# Altium PCB 夏友.PcbDoc (part 1 of 6)
Units mm, origin at the board's own origin, x right, y up, seen from the top; angles counter-clockwise.
Board outline 130.55 x 65.02 mm, 2 copper layers (Top Layer, Bottom Layer); 162 components, 175 nets, 628 pads, 694 vias.
Unrouted connection lines stored in the file: 1.
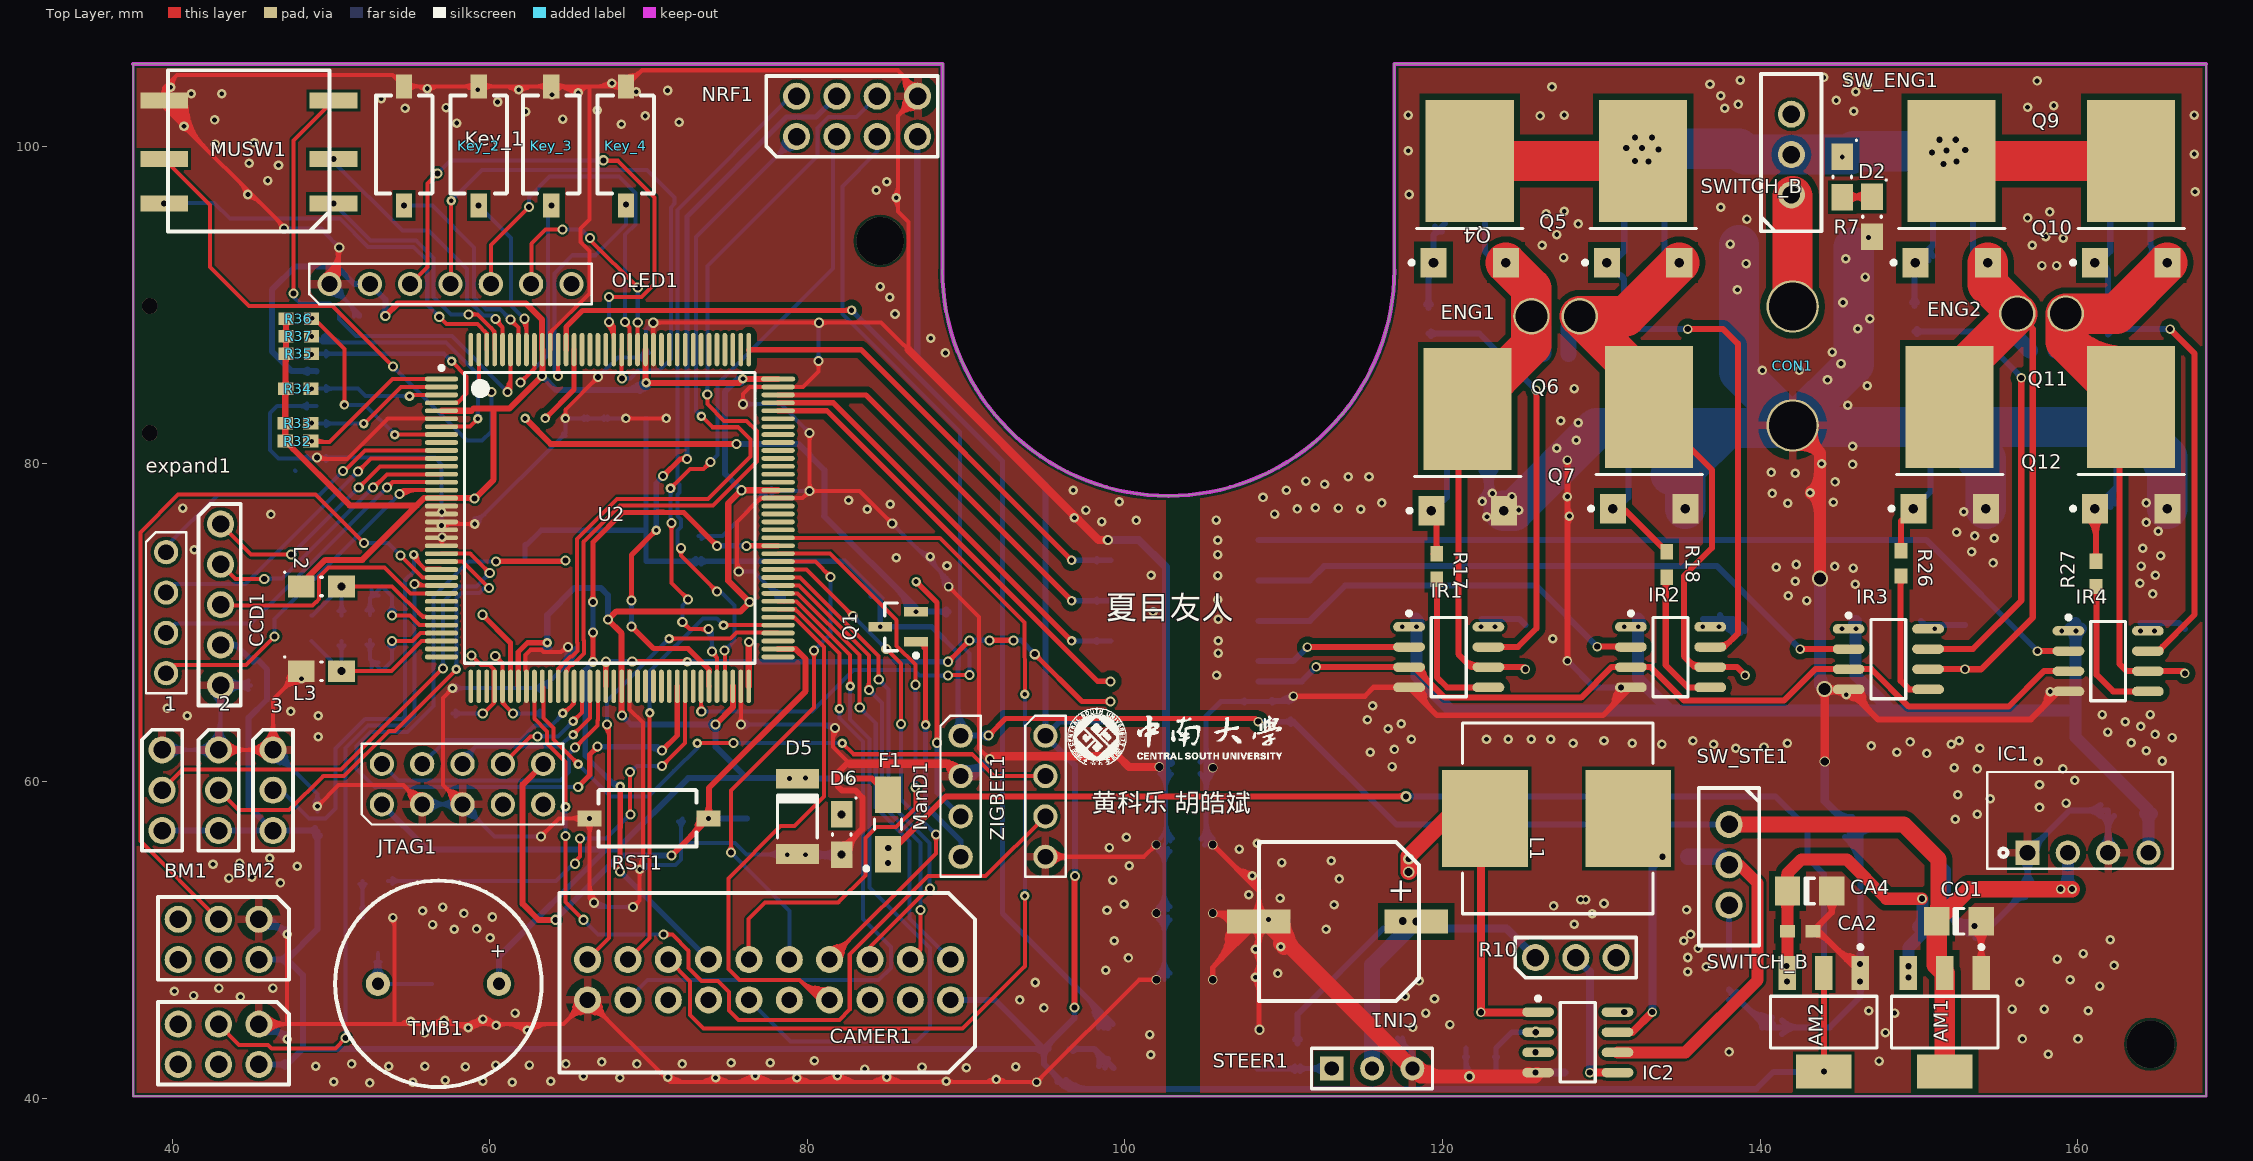
[diagram p0: Top Layer view]
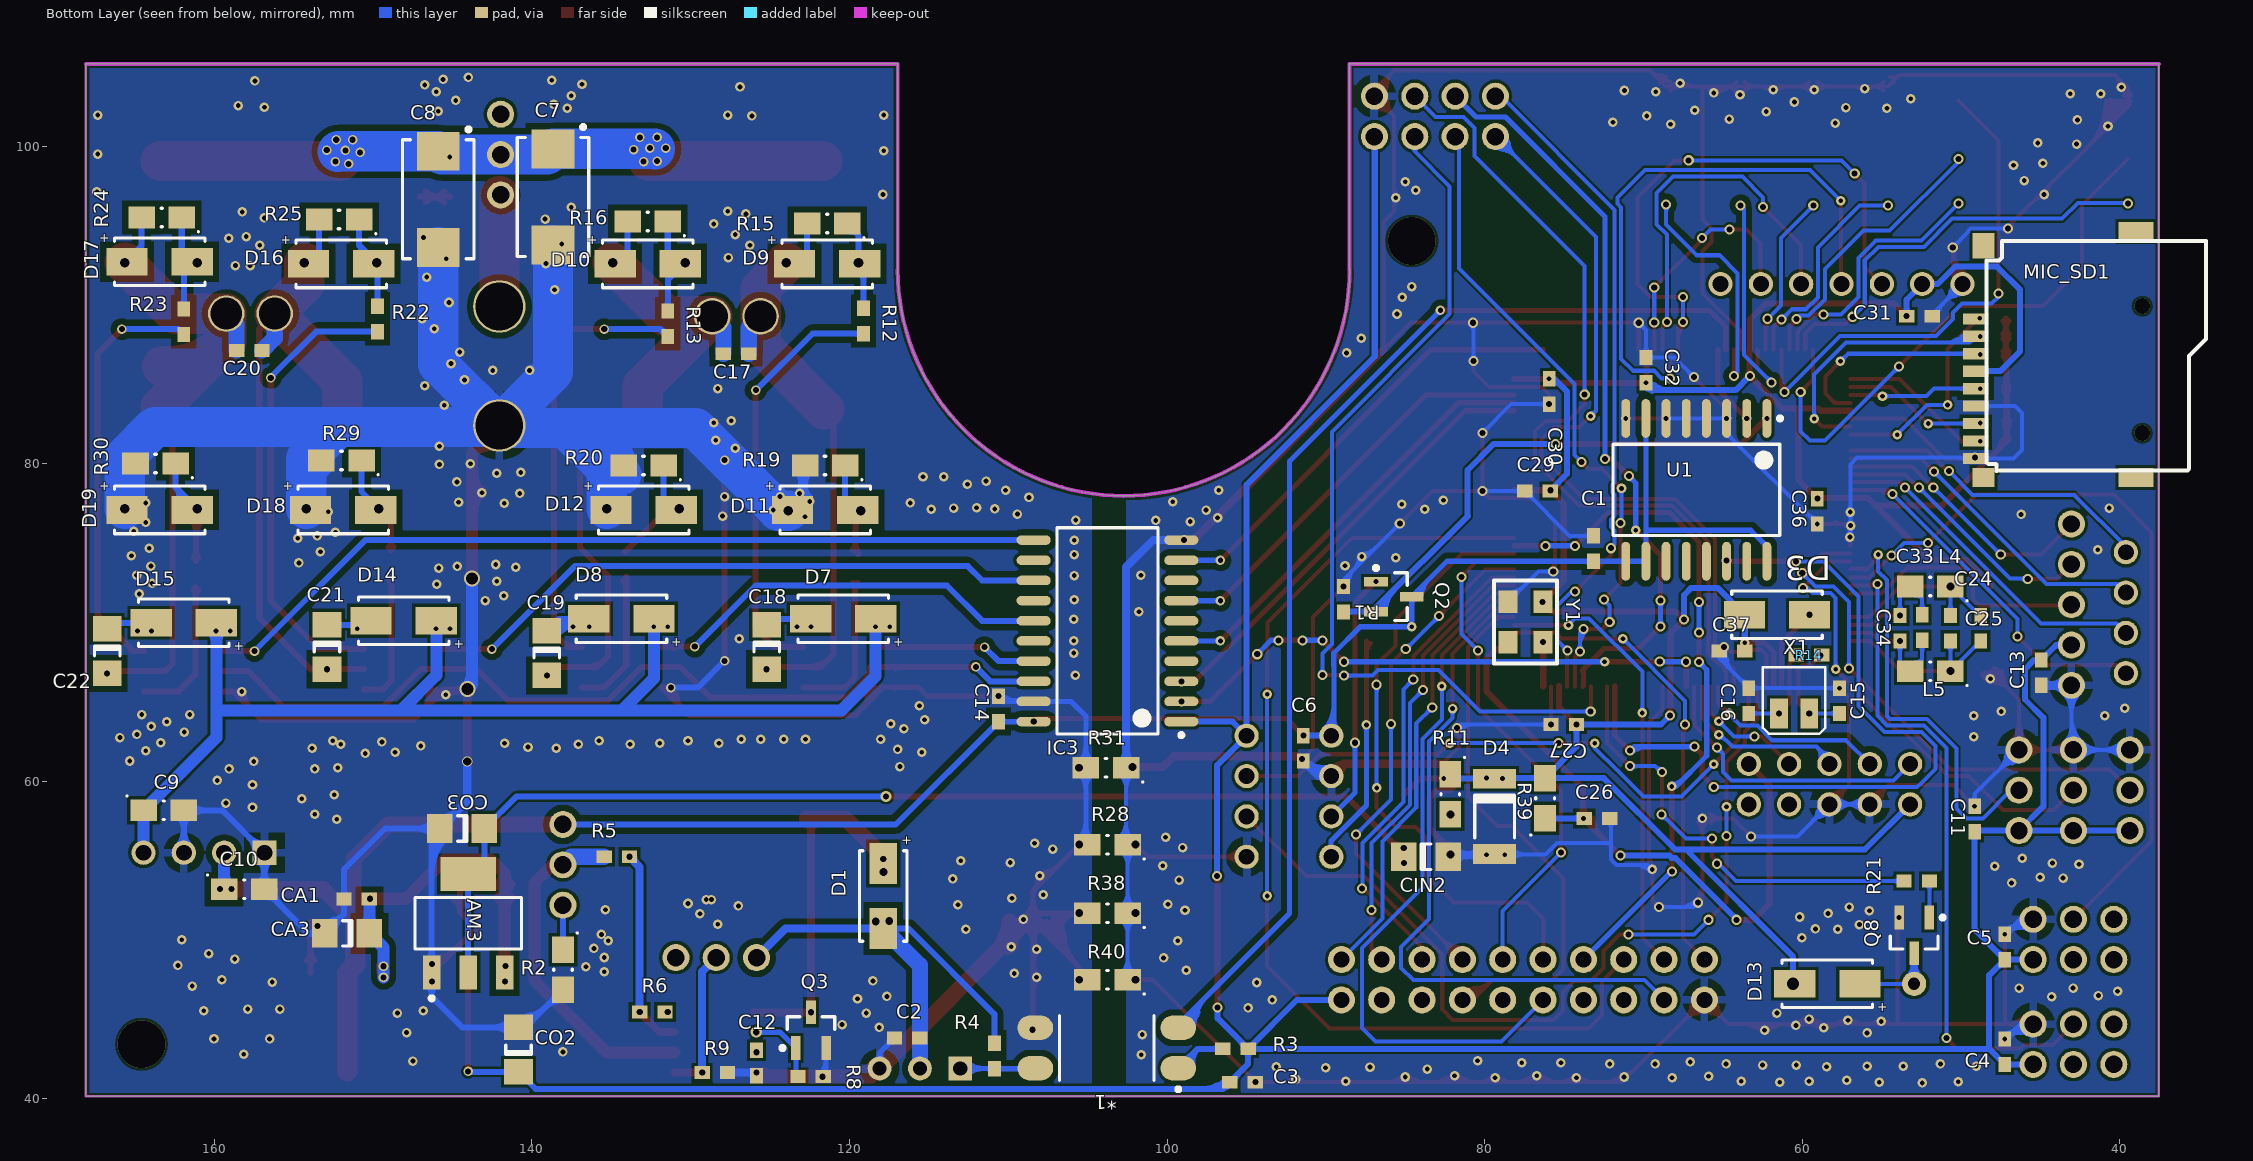
[diagram p1: Bottom Layer view, seen from below]

## Layer stack, top to bottom
Top Layer: signal copper 0.0356
Dielectric: dielectric 0.32, FR-4, Dk 4.8
Bottom Layer: signal copper 0.0356

## Board outline
37.542,40.162 37.542,105.177 88.519,105.177 88.519,92.202 88.509,92.202 ccw(c102.738,92.202) 116.967,92.202 116.967,105.177 168.094,105.177 168.094,40.162

## Design rules (kind name [scope] priority, off if disabled: settings)
Clearance Clearance_5 [InNetClass('Big_current') vs inpoly] p1: gap=0.381
Clearance Clearance_4 [InNetClass('SIN_pwm') vs inpoly] p2: gap=0.381
Clearance Clearance_3 [InNetClass('SIN_clk') vs inpoly] p3: gap=0.381
Clearance Clearance_2 [ispad vs inpoly] p4: gap=0.203
Clearance Clearance_1 [isvia vs inpoly] p5: gap=0.152
Clearance [All] p6: gap=0.152
PolygonConnect PolygonConnect_3 [InPadClass('Big_current') vs ispoly] p1: connectstyle=Direct reliefconductorwidth=0.254 reliefentries=4 polygonreliefangle="90 Angle" airgapwidth=0.254
PolygonConnect PolygonConnect_2 [IsThruPin vs ispoly] p2: connectstyle=Relief reliefconductorwidth=0.508 reliefentries=4 polygonreliefangle="90 Angle" airgapwidth=0.508
PolygonConnect PolygonConnect_1 [IsSMTPin or IsVia vs ispoly] p3: connectstyle=Direct reliefconductorwidth=0.254 reliefentries=4 polygonreliefangle="90 Angle" airgapwidth=0.254
PolygonConnect [All] p4: connectstyle=Relief reliefconductorwidth=0.508 reliefentries=4 polygonreliefangle="90 Angle" airgapwidth=0.508
RoutingVias [All] p1: holewidth=0.3 width=0.6 viastyle="Through Hole" minholewidth=0.3 minwidth=0.6 maxholewidth=100 maxwidth=100
SolderMaskExpansion [All] p1: expansion=0.102
Width [All] p1: maxlimit=25.4 minlimit=0.254 preferedwidth=0.254
Width SIN_pwm_ad [InNetClass('SIN_pwm') or InNetClass('SIN_ad')] p2: maxlimit=0.381 minlimit=0.33 preferedwidth=0.33
28 further rules are at their usual default settings.

## Classes and differential pairs
net class SIN_pwm: NetC17_1 NetC17_2 NetC20_1 NetC20_2 NetD9_2 NetD10_2 NetD11_2 NetD12_2 NetD16_2 NetD17_2 NetD18_2 NetD19_2 NetIR1_5 NetIR1_7 NetIR2_5 NetIR2_7 NetIR3_5 NetIR3_7 NetIR4_5 NetIR4_7 PTC1 PTC2 PTC3 PTC4 PTD4 PTD5 PTD6 PTD7 PWM1 PWM2 PWM3 PWM4 PWM_STEER
net class SIN_ad: AD0 AD1 AD2 AD3 AD4 AD5
net class Big_current: BATTERY NetC17_1 NetC17_2 NetC20_1 NetC20_2 NetCON1_2 VCC-5.5V VCC-5V
net class SIN_clk: CLK TCLK
net class V_other: +3.3V MPU_3V3 NetIC2_6 OSC VBAT VCC-3.3V VCC-15V VDDA VRH

## Components (designator, comment, footprint, x,y, rotation, side; value= is the part's Value field where it differs from the comment)
1 "CON3" HDR1*3 39.37,61.976 r0 top
2 "CON3" HDR1*3 42.926,61.976 r0 top
3 "CON3" HDR1*3 46.355,61.976 r0 top
*1 "IC 2*2" PC817 103.8,43.2 r0 bottom
AM1 "AMS1117" SOT223 151.638,44.831 r180 top
AM2 "AMS1117" SOT223 144.018,44.831 r180 top
AM3 "AMS1117" SOT223 144.018,51.054 r180 bottom
BM1 "±ŕÂëĆ÷×ó" HDR2*3 45.466,51.308 r270 top
BM2 "±ŕÂëĆ÷×ó" HDR2*3 45.466,44.704 r270 top
C1 "Cap Semi" 0603 73.15,73.85 r90 bottom
C2 "Cap" 0603 117.175,43.825 r180 bottom
C3 "Cap" 0603 94.45,41.05 r0 bottom
C4 "Cap Semi" 0603 47.244,42.164 r90 bottom
C5 "Cap Semi" 0603 47.244,48.768 r90 bottom
C6 "Cap Semi" 0603 91.425,62.875 r270 bottom
C7 "220uF" CAPMP7344X43N 138.675,96.8 r270 bottom
C8 "220uF" CAPMP7344X43N 145.9,96.65 r270 bottom
C9 "105" 0805 163.195,58.166 r180 bottom
C10 "475" 0805 158.125,53.2 r180 bottom
C11 "Cap Semi" 0603 49.149,58.42 r270 bottom
C12 "Cap Semi" 0603 125.857,43.053 r270 bottom
C13 "Cap Semi" 0603 44.958,66.04 r90 bottom
C14 "Cap Semi" 0603 110.617,63.754 r90 bottom
C15 "Cap Semi" 0603 57.658,64.262 r90 bottom
C16 "Cap Semi" 0603 63.373,64.262 r90 bottom
C17 "Cap Semi" 0603 127.95,86.925 r180 bottom
C18 "1uF" C1206 125.222,68.453 r270 bottom
C19 "1uF" C1206 139.065,68.072 r270 bottom
C20 "Cap Semi" 0603 158.6,87.125 r180 bottom
C21 "1uF" C1206 152.908,68.453 r270 bottom
C22 "1uF" C1206 166.751,68.199 r270 bottom
C24 "Cap Semi" 0603 48.768,68.834 r90 bottom
C25 "Cap Semi" 0603 50.673,68.834 r90 bottom
C26 "Cap Semi" 0603 72.136,57.658 r0 bottom
C27 "Cap Semi" 0603 75.825,63.575 r180 bottom
C29 "Cap Semi" 0603 77.475,78.275 r180 bottom
C30 "Cap Semi" 0603 75.946,85.344 r270 bottom
C31 "Cap Semi" 0603 53.425,89.275 r180 bottom
C32 "Cap Semi" 0603 69.85,85.09 r90 bottom
C33 "Cap Semi" 0603 52.451,70.485 r270 bottom
C34 "Cap Semi" 0603 53.848,68.834 r90 bottom
C36 "Cap Semi" 0603 59.055,76.2 r90 bottom
C37 "Cap Semi" 0603 63.627,68.199 r0 bottom
CA1 "Cap Semi" 0603 150.241,52.578 r0 bottom
CA2 "Cap Semi" 0603 141.732,50.546 r0 top
CA3 "10uF" C1206 151.638,50.419 r0 bottom
CA4 "10uF" C1206 143.129,53.086 r0 top
CAMER1 "CAMER" HDR2*10-10*25 89.027,48.768 r270 top
CCD1 "CON5" HDR1*5 43.053,76.2 r0 top
CIN1 "470uF" 470uf-column 113.45,51.175 r270 top
CIN2 "10uF" C1206 83.693,55.245 r180 bottom
CO1 "22uF" C1206 152.527,51.181 r0 top
CO2 "22uF" C1206 140.85,43.1 r90 bottom
CO3 "22uF" C1206 144.399,57.023 r0 bottom
CON1 "PowerIn" Battery 142.05,82.025 r90 top
D1 "1N5819" SS14 117.875,52.775 r270 bottom
D2 "LED0" 0805 145.175,98.05 r270 top
D3 "IN5819" SS14 61.595,70.485 r180 bottom
D4 "Z M4728" LL41 79.375,57.785 r90 bottom
D5 "ZM4728" LL41 79.375,57.785 r90 top
D6 "LED" 0805 82.169,56.642 r270 top
D7 "1N5819" SS14 120.396,70.231 r0 bottom
D8 "1N5819" SS14 134.366,70.231 r0 bottom
D9 "1N5819" SS14 121.412,92.583 r180 bottom
D10 "1N5819" SS14 132.715,92.583 r180 bottom
D11 "1N5819" SS14 121.539,77.089 r180 bottom
D12 "1N5819" SS14 132.969,77.089 r180 bottom
D13 "IN5819" SS14 58.42,47.244 r0 bottom
D14 "1N5819" SS14 148.082,70.104 r0 bottom
D15 "1N5819" SS14 161.925,69.977 r0 bottom
D16 "1N5819" SS14 152.019,92.583 r180 bottom
D17 "1N5819" SS14 163.449,92.71 r180 bottom
D18 "1N5819" SS14 151.892,77.089 r180 bottom
D19 "1N5819" SS14 163.449,77.089 r180 bottom
ENG1 "PowerIn" Dynamo 128.651,89.281 r180 top
ENG2 "PowerIn" Dynamo 159.25,89.45 r180 top
expand1 "CON4" HDR1*4 39.624,74.422 r0 top
F1 "500mA" 1206 85.09,57.277 r90 top
IC1 "B0515S" B0512S 156.845,55.499 r0 top
IC2 "MC34063" SO-8 128.524,43.561 r0 top
IC3 "74hc245" 74HC245D 103.759,69.469 r0 bottom
IR1 "IR2104S" SO-8 120.396,67.818 r0 top
IR2 "IR2104S" SO-8 134.366,67.818 r0 top
IR3 "IR2104S" SO-8 148.082,67.691 r0 top
IR4 "IR2104S" SO-8 161.925,67.564 r0 top
JTAG1 "HEADER 5X2" HDR2*5 53.213,58.547 r90 top
Key_1 "°´ĹĄżŞąŘ" KEY-2 54.61,100.076 r180 top
Key_2 "°´ĹĄżŞąŘ" KEY-2 59.309,100.076 r180 top
Key_3 "°´ĹĄżŞąŘ" KEY-2 63.881,100.076 r180 top
Key_4 "°´ĹĄżŞąŘ" KEY-2 68.58,100.076 r180 top
L1 "Inductor" "INDUCTOR 12*12*7" 127.254,57.658 r0 top
L2 "Inductor" 0805 49.403,72.263 r0 top
L3 "Inductor" 0805 49.403,66.929 r0 top
L4 "Inductor" 0805 51.943,72.263 r0 bottom
L5 "Inductor" 0805 51.943,66.929 r0 bottom
ManD1 "HDR1*4" HDR1*4 89.662,62.865 r0 top
MIC_SD1 "ON9" TF-2 44.039,86.871 r180 bottom locked
MUSW1 "MF_SW" MUL_SW 49.911,94.615 r180 top
NRF1 "HEADER 4X2" HDR2*4 79.325,100.6 r90 top
OLED1 "HDR1*7" HDR1*7 49.911,91.313 r90 top
Q1 "NPN" SOT95P280X125-3N 85.725,69.723 r180 top
Q2 "NPN" SOT95P280X125-3N 85.725,71.628 r180 bottom
Q3 "NPN" SOT95P280X125-3N 122.428,44.323 r90 bottom
Q4 "MOSFET-N" LR7843 121.793,97.536 r270 top
Q5 "MOSFET-N" LR7843 132.715,97.536 r270 top
Q6 "MOSFET-N" LR7843 121.666,81.915 r270 top
Q7 "MOSFET-N" LR7843 133.096,82.042 r270 top
Q8 "NPN" SOT95P280X125-3N 52.959,50.292 r270 bottom
Q9 "MOSFET-N" LR7843 152.146,97.536 r270 top
Q10 "MOSFET-N" LR7843 163.449,97.536 r270 top
Q11 "MOSFET-N" LR7843 152.019,82.042 r270 top
Q12 "MOSFET-N" LR7843 163.449,82.042 r270 top
R1 "Res2" 0603 88.9,72.263 r270 bottom
R2 "332" 0805 138.049,48.133 r270 bottom
R3 "Res2" 0603 96.5,43.15 r180 bottom
R4 "Res2" 0603 110.875,41.9 r90 bottom
R5 "Res2" 0603 133.858,55.245 r0 bottom
R6 "Res2" 0603 133.223,45.466 r180 bottom
R7 "10k" 0805 147.05,95.55 r270 top
R8 "Res2" 0603 121.65,41.4 r0 bottom
R9 "Res2" 0603 129.286,41.656 r180 bottom
R10 "50k" HDR1*3 125.857,48.895 r90 top
R11 "1k" 0805 82.169,59.182 r270 bottom
R12 "Res1" 0603 119.126,89.789 r270 bottom
R13 "Res1" 0603 131.445,88.011 r90 bottom
R14 "1M" 0603 58.775,67.95 r0 bottom
R15 "Res1" 0805 121.412,95.123 r0 bottom
R16 "Res1" 0805 132.715,95.25 r0 bottom
R17 "Res1" 0603 119.65,74.325 r270 top
R18 "Res1" 0603 134.125,72.85 r90 top
R19 "Res1" 0805 121.539,79.883 r0 bottom
R20 "Res1" 0805 132.969,79.883 r0 bottom
R21 "10k" 0603 53.594,53.721 r180 bottom
R22 "Res1" 0603 149.733,89.916 r270 bottom
R23 "Res1" 0603 161.925,88.138 r90 bottom
R24 "Res1" 0805 163.322,95.504 r0 bottom
R25 "Res1" 0805 152.146,95.377 r0 bottom
R26 "Res1" 0603 148.875,74.525 r270 top
R27 "Res1" 0603 161.163,72.263 r90 top
R28 "Res3" 0805 103.759,56.007 r0 bottom
R29 "Res1" 0805 152,80.2 r0 bottom
R30 "Res1" 0805 163.703,80.01 r0 bottom
R31 "Res3" 0805 103.85,60.85 r0 bottom
R32 "47k" 0603 47.125,81.425 r0 top
R33 "47k" 0603 47.125,82.55 r0 top
R34 "47k" 0603 47.15,84.725 r0 top
R35 "47k" 0603 47.175,86.925 r0 top
R36 "47k" 0603 47.175,89.125 r0 top
R37 "47k" 0603 47.175,88.025 r0 top
R38 "Res3" 0805 103.759,51.689 r0 bottom
R39 "103" 0805 76.2,58.928 r90 bottom
R40 "Res3" 0805 103.759,47.498 r0 bottom
RST1 "°´ĹĄżŞąŘ" KEY-2 69.977,57.658 r270 top
STEER1 "Header_Server" HDR1X3 113.03,41.91 r0 top
SW_ENG1 "SWITCH_B" ss12 141.975,96.925 r90 top
SW_STE1 "SWITCH_B" ss12 138.049,57.277 r270 top
TMB1 "Bell" DIP_buzzer 56.769,47.244 r270 top
U1 "74LS160" SOIC-16 66.675,78.35 r270 bottom
U2 "MK60DN512ZVLQ10" MK60DN512ZVLQ10 67.564,76.581 r0 top
X1 "32.768kHz" "XT 32768" 59.055,63.373 r0 bottom
Y1 "50MHZ\3.3v" ÓĐÔ´ľ§Őń5*3.2 77.47,69.977 r270 bottom
ZIGBEE1 "CON4" HDR1*4 94.996,62.865 r0 top

## Footprints (in the part's own frame and the unit in brackets; to place one, negate y for a bottom-side part, rotate by r counter-clockwise, add the part's x,y. Pads: shape width x height; smd on the part's side, far side on the other; paste and mask are expansions set on the pad)
74HC245D [mm] "SOP, 20-Leads, Body 12.80x7.50mm, Pitch 1.27mm, Thermal Pad 4.20.2x3.00.2mm, IPC Medium Density"
  oval 2.15x0.6 smd: 1(-4.65,5.715) 2(-4.65,4.445) 3(-4.65,3.175) 4(-4.65,1.905) 5(-4.65,0.635) 6(-4.65,-0.635) 7(-4.65,-1.905) 8(-4.65,-3.175) 9(-4.65,-4.445) 10(-4.65,-5.715) 11(4.65,-5.715) 12(4.65,-4.445) 13(4.65,-3.175) 14(4.65,-1.905) 15(4.65,-0.635) 16(4.65,0.635) 17(4.65,1.905) 18(4.65,3.175) 19(4.65,4.445) 20(4.65,5.715)
  silkscreen extent -4.77,-6.5 3.17,6.69, body extent -3.8,-6.5 3.8,6.5, height 2.65
470uf-column [mil] "C?"
  rect 60x157.48 smd: 1(0,193) 2(0,-197)
  silkscreen extent -197,-197 197,200
0603 [mm] "Chip Inductor, 2-Leads, Body 2.54x0.80mm, IPC Medium Density"
  rect 0.965x0.8 smd: 1(0,0) 2(1.6,0)
  body extent -0.23,-0.4 2.31,0.4, height 0.8
0805 [mm] "Chip Inductor, 2-Leads, Body 3.20x1.25mm, IPC Medium Density"
  rect 1.67x1.37 smd: 1(-1.265,0) 2(1.265,0)
  silkscreen extent -2.36,-0.59 0.05,0.95, body extent -1.6,-0.63 1.6,0.63, height 1.25
1206 [mm] "Molded Capacitor, 2-Leads, Body 4.94x1.60mm, IPC Medium Density"
  rect 2.3x1.65 smd: 1(-1.875,0) 2(1.875,0)
  silkscreen extent -2.9,-0.85 0.33,1.5
B0512S [mil]
  rect 60x60 hole 39.37: 1(0,0)
  round 60 hole 39.37: 2(100,0) 3(200,0) 4(300,0)
  silkscreen extent -100,-40 360,200
Battery [mm]
  round 3.3 hole 3: 1(0.381,0) 2(7.874,0)
C1206 [mm] "Chip Capacitor; Body 3.2 x 1.6 mm (LxW typ)"
  rect 1.6x1.8 smd: 1(-1.4,0) 2(1.4,0)
  silkscreen extent -0.3,-0.8 0.3,0.8
CAPMP7344X43N [mm] "Molded Capacitor, 2-Leads, Body 7.30x4.35mm, IPC Medium Density"
  rect 2.45x2.7 smd: 1(-3.025,0) 2(3.025,0)
  silkscreen extent -4.52,-2.25 3.75,2.25, body extent -3.75,-2.25 3.75,2.25, height 4.3
DIP_buzzer [mil]
  round 60 hole 30: 1(0,150) 2(0,-150)
  silkscreen extent -256,-256 256,256
Dynamo [mm]
  round 2.3 hole 2: 1(0,0) 2(3.048,0)
HDR1*3 [mm]
  round 1.7 hole 1.1: 1(0,0) 2(0,-2.54) 3(0,-5.08)
  silkscreen extent -1.27,-6.35 1.27,1.27
HDR1*4 [mil]
  round 60 hole 39.37: 1(0,0) 2(0,-100) 3(0,-200) 4(0,-300)
  silkscreen extent -50,-350 50,50
HDR1*5 [mm]
  round 1.7 hole 1.1: 1(0,0) 2(0,-2.54) 3(0,-5.08) 4(0,-7.62) 5(0,-10.16)
  silkscreen extent -1.4,-11.43 1.27,1.27
HDR1*7 [mil]
  round 60 hole 39.37: 1(0,0) 2(0,-100) 3(0,-200) 4(0,-300) 5(0,-400) 6(0,-500) 7(0,-600)
  silkscreen extent -50,-650 50,50
HDR1X3 [mm] "Connector; Header; 3 Position"
  rect 1.5x1.5 hole 0.9: 1(0,0)
  round 1.5 hole 0.9: 2(2.54,0) 3(5.08,0)
  silkscreen extent -1.27,-1.27 6.35,1.27
HDR2*3 [mm]
  round 1.7 hole 1.1: 1(0,0) 2(2.54,0) 3(0,-2.54) 4(2.54,-2.54) 5(0,-5.08) 6(2.54,-5.08)
  silkscreen extent -1.4,-6.35 3.81,1.91
HDR2*4 [mm]
  round 1.7 hole 1.1: 1(0,0) 2(2.54,0) 3(0,-2.54) 4(2.54,-2.54) 5(0,-5.08) 6(2.54,-5.08) 7(0,-7.62) 8(2.54,-7.62)
  silkscreen extent -1.27,-8.89 3.81,1.91
HDR2*5 [mil]
  round 60 hole 39.37: 1(0,0) 2(100,0) 3(0,-100) 4(100,-100) 5(0,-200) 6(100,-200) 7(0,-300) 8(100,-300) 9(0,-400) 10(100,-400)
  silkscreen extent -50,-450 150,50
HDR2*10-10*25 [mm]
  round 1.7 hole 1: 1(0,0) 2(2.54,0) 3(0,-2.54) 4(2.54,-2.54) 5(0,-5.08) 6(2.54,-5.08) 7(0,-7.62) 8(2.54,-7.62) 9(0,-10.16) 10(2.54,-10.16) 11(0,-12.7) 12(2.54,-12.7) 13(0,-15.24) 14(2.54,-15.24) 15(0,-17.78) 16(2.54,-17.78) 17(0,-20.32) 18(2.54,-20.32) 19(0,-22.86) 20(2.54,-22.86)
  silkscreen extent -4.19,-24.64 7.11,1.52
"INDUCTOR 12*12*7" [mm] "Precision Wire Wound Inductor, 2-Leads, Body 12.00x12.00mm, IPC Medium Density"
  rect 5.4x6.1 smd: 1(-4.572,0) 2(4.445,0)
  silkscreen extent -6,-6 6,6, body extent -6,-6 6,6, height 7
KEY-2 [mil]
  rect 40x60 smd: 1(0,150) 2(0,-145)
  silkscreen extent -70,-123 70,120
LL41 [mm] "MELF Diode, 2-Leads, Body 5.00x2.45mm, IPC Medium Density"
  rect 1.25x2.7 smd: 1(-2.375,0) 2(2.375,0)
  silkscreen extent -1.35,-1.25 1.35,1.25, body extent -2.6,-1.28 2.6,1.27, height 2.54
LR7843 [mm] "D-PAK, 3-Pads, Body 6.21x6.73mm (max), IPC Medium Density"
  rect 7.7x5.55 smd: 1(-1.521,-0.076)
  rect 1.85x1.65 smd: 2(4.879,-2.356) 3(4.879,2.204)
  silkscreen extent 2.73,-3.86 5,3.27, body extent -2.15,-3.37 4.07,3.37, height 2.38
MK60DN512ZVLQ10 [mm] "K60·â?"
  oval 2.1x0.3 smd: 1(-10.6,8.75) 2(-10.6,8.25) 3(-10.6,7.75) 4(-10.6,7.25) 5(-10.6,6.75) 6(-10.6,6.25) 7(-10.6,5.75) 8(-10.6,5.25) 9(-10.6,4.75) 10(-10.6,4.25) 11(-10.6,3.75) 12(-10.6,3.25) 13(-10.6,2.75) 14(-10.6,2.25) 15(-10.6,1.75) 16(-10.6,1.25) 17(-10.6,0.75) 18(-10.6,0.25) 19(-10.6,-0.25) 20(-10.6,-0.75) 21(-10.6,-1.25) 22(-10.6,-1.75) 23(-10.6,-2.25) 24(-10.6,-2.75) 25(-10.6,-3.25) 26(-10.6,-3.75) 27(-10.6,-4.25) 28(-10.6,-4.75) 29(-10.6,-5.25) 30(-10.6,-5.75) 31(-10.6,-6.25) 32(-10.6,-6.75) 33(-10.6,-7.25) 34(-10.6,-7.75) 35(-10.6,-8.25) 36(-10.6,-8.75) 73(10.6,-8.75) 74(10.6,-8.25) 75(10.6,-7.75) 76(10.6,-7.25) 77(10.6,-6.75) 78(10.6,-6.25) 79(10.6,-5.75) 80(10.6,-5.25) 81(10.6,-4.75) 82(10.6,-4.25) 83(10.6,-3.75) 84(10.6,-3.25) 85(10.6,-2.75) 86(10.6,-2.25) 87(10.6,-1.75) 88(10.6,-1.25) 89(10.6,-0.75) 90(10.6,-0.25) 91(10.6,0.25) 92(10.6,0.75) 93(10.6,1.25) 94(10.6,1.75) 95(10.6,2.25) 96(10.6,2.75) 97(10.6,3.25) 98(10.6,3.75) 99(10.6,4.25) 100(10.6,4.75) 101(10.6,5.25) 102(10.6,5.75) 103(10.6,6.25) 104(10.6,6.75) 105(10.6,7.25) 106(10.6,7.75) 107(10.6,8.25)
  oval 0.3x2.1 smd: 37(-8.75,-10.6) 38(-8.25,-10.6) 39(-7.75,-10.6) 40(-7.25,-10.6) 41(-6.75,-10.6) 42(-6.25,-10.6) 43(-5.75,-10.6) 44(-5.25,-10.6) 45(-4.75,-10.6) 46(-4.25,-10.6) 47(-3.75,-10.6) 48(-3.25,-10.6) 49(-2.75,-10.6) 50(-2.25,-10.6) 51(-1.75,-10.6) 52(-1.25,-10.6) 53(-0.75,-10.6) 54(-0.25,-10.6) 55(0.25,-10.6) 56(0.75,-10.6) 57(1.25,-10.6) 58(1.75,-10.6) 59(2.25,-10.6) 60(2.75,-10.6) 61(3.25,-10.6) 62(3.75,-10.6) 63(4.25,-10.6) 64(4.75,-10.6) 65(5.25,-10.6) 66(5.75,-10.6) 67(6.25,-10.6) 68(6.75,-10.6) 69(7.25,-10.6) 70(7.75,-10.6) 71(8.25,-10.6) 72(8.75,-10.6) 109(8.75,10.6) 110(8.25,10.6) 111(7.75,10.6) 112(7.25,10.6) 113(6.75,10.6) 114(6.25,10.6) 115(5.75,10.6) 116(5.25,10.6) 117(4.75,10.6) 118(4.25,10.6) 119(3.75,10.6) 120(3.25,10.6) 121(2.75,10.6) 122(2.25,10.6) 123(1.75,10.6) 124(1.25,10.6) 125(0.75,10.6) 126(0.25,10.6) 127(-0.25,10.6) 128(-0.75,10.6) 129(-1.25,10.6) 130(-1.75,10.6) 131(-2.25,10.6) 132(-2.75,10.6) 133(-3.25,10.6) 134(-3.75,10.6) 135(-4.25,10.6) 136(-4.75,10.6) 137(-5.25,10.6) 138(-5.75,10.6) 139(-6.25,10.6) 140(-6.75,10.6) 141(-7.25,10.6) 142(-7.75,10.6) 143(-8.25,10.6) 144(-8.75,10.6)
  oval 2.159x0.3 smd: 108(10.6,8.75)
  silkscreen extent -10.72,-9.15 9.15,9.57, body extent -10,-10 10,10, height 1.6
MUL_SW [mm]
  rect 3x1 smd: 1(-0.254,-1.778) 2(-0.254,-4.572) 3(-0.254,-8.255) 4(10.414,-8.255) 5(10.414,-4.572) 6(10.414,-1.778)
  silkscreen extent 0,-10.16 10.16,0
PC817 [mm] "SOP, 4-Leads, Body 4.58x7.50mm, Pitch 2.54mm, Thermal Pad 4.20.2x3.00.2mm, IPC Medium Density"
  oval 2.25x1.55 smd: 1(-4.5,1.27) 2(-4.5,-1.27) 3(4.5,-1.27) 4(4.5,1.27)
  silkscreen extent -4.62,-2.05 2.97,2.72, body extent -3.8,-2.05 3.8,2.05, height 4
SO-8 [mm]
  oval 2x0.6 smd: 1(-2.5,1.905) 2(-2.5,0.635) 3(-2.5,-0.635) 4(-2.5,-1.905) 5(2.5,-1.905) 6(2.5,-0.635) 7(2.5,0.635) 8(2.5,1.905)
  silkscreen extent -2.62,-2.5 1.1,2.88, body extent -2,-2.5 2,2.5, height 1.75
SOIC-16 [mm] "SOP, 16-Leads, Body 10.30x7.50mm, Pitch 1.27mm, IPC Medium Density"
  oval 2.45x0.55 smd: 1(-4.5,4.445) 2(-4.5,3.175) 3(-4.5,1.905) 4(-4.5,0.635) 5(-4.5,-0.635) 6(-4.5,-1.905) 7(-4.5,-3.175) 8(-4.5,-4.445) 9(4.5,-4.445) 10(4.5,-3.175) 11(4.5,-1.905) 12(4.5,-0.635) 13(4.5,0.635) 14(4.5,1.905) 15(4.5,3.175) 16(4.5,4.445)
  silkscreen extent -4.62,-5.25 2.87,5.39, body extent -3.8,-5.25 3.8,5.25, height 2.65
SOT95P280X125-3N [mm] "SOT23, 3-Leads, Body 2.92x2.80mm, Pitch 0.95mm, IPC Medium Density"
  rect 1.5x0.6 smd: 1(1.125,0) 2(-1.125,0.95) 3(-1.125,-0.95)
  silkscreen extent -1.25,-1.5 0.85,1.92, body extent -0.85,-1.51 0.85,1.51, height 1.25
SOT223 [mm]
  rect 1.1x2.15 smd: 1(-2.3,-3.1) 2(0,-3.1) 3(2.3,-3.1)
  rect 3.5x2.15 smd: 2(0,3.1)
  silkscreen extent -3.35,-4.85 3.35,1.63
ss12 [mm]
  round 1.7 hole 1.1: 1(0,0) 2(2.54,0) 3(5.08,0)
  silkscreen extent -2.29,-1.91 7.62,1.91
SS14 [mm] "Molded Capacitor, 2-Leads, Body 5.25x2.60mm, IPC Medium Density"
  rect 2.6x1.75 smd: 1(-2.05,0) 2(2.05,0)
  silkscreen extent -2.85,-1.5 2.85,1.5, body extent -2.84,-1.46 2.84,1.46, height 2.41
TF-2 [mm]
  rect 1.6x0.7 smd: 1(-5.05,2.25) 2(-5.05,1.15) 3(-5.05,0.05) 4(-5.05,-1.05) 5(-5.05,-2.15) 6(-5.05,-3.25) 7(-5.05,-4.35) 8(-5.05,-5.45) 9(-5.05,-6.55)
  rect 2.2x1.2 smd: 10(5.05,-7.75) 11(5.05,7.75)
  rect 1.4x1.6 smd: 12(-4.55,6.85)
  rect 1.4x1.2 smd: 13(-4.55,-7.75)
  Top Layer lines w0.254: -3.688,-7.293 -3.738,-7.344
  silkscreen extent -4.35,-7.34 9.47,7.15
"XT 32768" [mil]
  rect 43.54x75 smd: 1(20,-35) 2(95,-35)
  silkscreen extent -20,-150 135,15
ÓĐÔ´ľ§Őń5*3.2 [mm] "5*3.2"
  rect 1.4x1.2 smd: 1(-1.321,-1.067) 2(1.219,-1.067) 3(1.219,1.133) 4(-1.321,1.133)
  silkscreen extent -2.65,-1.96 2.55,2.02

## Part data
1 2 3 CCD1 expand1 ZIGBEE1: "Connector"
BM1 BM2: library part "Header 3X2", "Header, 3-Pin, Dual row"
C1 C4 C5 C6 C11 C12 C13 C14 C15 C16 C17 C20 C24 C25 C26 C27 C29 C30 C31 C32 C33 C34 C36 C37 CA1 CA2: library part "Cap Semi_1", "Capacitor (Semiconductor SIM Model)"
C2 C3: "Capacitor"
C7 C8 CA3 CA4 CIN1 CIN2 CO1 CO2 CO3: library part ELECTRO2, "Electrolytic Capacitor"
C9 C10: library part Cap--0805, "µçČÝĆ÷"
C18 C19 C21 C22: library part "Cap Pol1", "Polarized Capacitor (Radial)"
CON1 ENG1 ENG2: library part "Header 2", "Header, 2-Pin"
D1 D7 D8 D9 D10 D11 D12 D14 D15 D16 D17 D18 D19: library part "Diode 11DQ03", "Schottky Rectifier"
D2: "Typical INFRARED GaAs LED"
D3 D4 D5 D13: library part "D Schottky", "Schottky Diode"
D6: "·˘ąâ¶ţĽ«ąÜ"
F1: library part FUSE
IC1: library part B0512S-1W
IC3: library part 74lvc245, "8Î»5·ü×Ş3.3·üµçĆ˝×Ş»»ĐľĆ¬"
IR1 IR2 IR3 IR4: "HALF-BRIDGE DRIVER"
MIC_SD1: library part CON9, "Connector"
Q1 Q2 Q3 Q8: library part QNPN, "NPN Bipolar Transistor"
Q4 Q5 Q6 Q7 Q9 Q10 Q11 Q12: "N-Channel MOSFET"
R1 R3 R4 R5 R6 R8 R9 R12 R13 R15 R16 R17 R18 R19 R20 R22 R23 R24 R25 R26 R27 R28 R29 R30 R31 R38 R40: "Resistor"
R2 R7 R11 R14 R21 R32 R33 R34 R35 R36 R37 R39: library part Res, "µç×č"
R10: library part ľ«ĂÜµçÎ»Ć÷
TMB1: "Electrical Bell"
U1: library part 74ALS161
U2: "K60"
X1: library part CRYSTAL_1

## Via types
v1: diameter 0.6, hole 0.3, Top Layer to Bottom Layer, 442 vias
v2: diameter 0.635, hole 0.381, Top Layer to Bottom Layer, 150 vias
v3: diameter 0.6, hole 0.381, Top Layer to Bottom Layer, 48 vias
v4: diameter 0.7, hole 0.6, Top Layer to Bottom Layer, 16 vias
v5: diameter 0.6, hole 0.5, Top Layer to Bottom Layer, 10 vias
v6: diameter 0.6, hole 0.4, Top Layer to Bottom Layer, 7 vias
v7: diameter 0.7, hole 0.5, Top Layer to Bottom Layer, 5 vias
v8: diameter 0.6, hole 0.33, Top Layer to Bottom Layer, 5 vias
v9: diameter 0.7, hole 0.4, Top Layer to Bottom Layer, 3 vias
v10: diameter 1, hole 1, Top Layer to Bottom Layer, 2 vias
v11: diameter 3, hole 3, Top Layer to Bottom Layer, 2 vias
v12: diameter 1.016, hole 0.762, Top Layer to Bottom Layer, 2 vias
v13: diameter 0.7, hole 0.381, Top Layer to Bottom Layer, 1 vias
v14: diameter 0.635, hole 0.508, Top Layer to Bottom Layer, 1 vias

## Nets (pads, with @x,y where several pads share a name; then routed paths per layer and width w, separated by ;. In a path a pad name is that pad's centre, name@x,y a point inside that pad or via, vN(x,y) a via of type N, cw(c..) or ccw(c..) an arc to the next point about the centre after c; other vN are vias at no path point)
0M3: U2.30
0P3: U2.29
0S16: U2.36
1S16: U2.35
1S18: U2.37
+3.3V: AM3.2 CIN2.1 CO3.1 F1.1 | length 74.5
  Top Layer w0.381: F1.1@85.09,55.402 88.738,59.05 v13(117.7,59.05) ; F1.1@85.195,55.745 cw(c85.737,55.433) F1.1@85.575,56.037 ; 117.315,59.05 cw(c117.315,58.665) 117.587,58.937 ccw(c117.315,58.665) 117.315,59.05 ; 117.315,59.05 ccw(c117.315,59.435) 117.587,59.163 cw(c117.315,59.435) 117.315,59.05 ; F1.1@85.1,55.909 ccw(c85.1,57.111) 85.949,56.261 cw(c85.1,57.111) F1.1@85.1,55.909
  Bottom Layer w0.381: v13(117.7,59.05) 140.972,59.05 CO3.1@142.999,57.023 142.999,55.173 AM3.2@144.018,54.154 AM3.2@144.018,47.954 ; 118.085,59.05 cw(c118.085,59.435) 117.813,59.163 ccw(c118.085,59.435) 118.085,59.05 ; 118.085,59.05 ccw(c118.085,58.665) 117.813,58.937 cw(c118.085,58.665) 118.085,59.05
  other v3: 85.075,54.85 85.1,55.8
AD0: 1.2 U2.23 | length 40.8
  Top Layer w0.254: 1.2@39.37,59.436 40.659,60.725 50.65,60.725 57.025,67.1 57.05,67.1 v2(57.053,67.103) ; U2.23@56.964,74.331 58.775,74.331 v2(60.003,73.104) ; v2@59.812,73.105 ccw(c59.365,73.109) 59.678,73.429 ; v2@59.812,73.108 ccw(c59.39,73.119) 59.685,73.421 ccw(c59.987,73.716) v2@59.998,73.294 ; 59.678,73.429 cw(c59.353,73.104) 59.812,73.104 ccw(c59.353,73.104) 59.678,73.429 ; 59.678,73.429 ccw(c60.003,73.754) 60.003,73.294 cw(c60.003,73.754) 59.678,73.429 ; 59.678,73.429 ccw(c59.998,73.741) v2@60.001,73.294 ; 59.687,73.419 cw(c59.371,73.111) 59.812,73.106 ccw(c59.371,73.111) 59.687,73.419 ; 59.687,73.42 ccw(c59.995,73.735) v2@60.001,73.294 ; 59.687,73.42 ccw(c59.995,73.735) v2@60.001,73.294
  Bottom Layer w0.254: v2(57.053,67.103) 57.053,71.278 58.05,72.275 59.174,72.275 v2(60.003,73.104) ; v2@59.812,73.101 cw(c59.371,73.096) 59.687,72.788 cw(c59.995,72.472) 60.001,72.913 ccw(c59.998,72.466) 59.678,72.778 ; v2@59.812,73.102 cw(c59.365,73.098) 59.678,72.778 ; 57.053,67.563 cw(c56.593,67.563) 56.918,67.238 ccw(c56.593,67.563) 57.053,67.563 ; 57.053,67.563 ccw(c57.513,67.563) 57.187,67.238 cw(c57.513,67.563) 57.053,67.563 ; 59.678,72.778 cw(c60.003,72.453) 60.003,72.913 ccw(c60.003,72.453) 59.678,72.778 ; 59.678,72.778 ccw(c59.353,73.104) 59.812,73.104 cw(c59.353,73.104) 59.678,72.778
AD1: 2.2 U2.24 | length 31
  Top Layer w0.254: 2.2@42.926,59.436 44.187,58.175 47.375,58.175 49.519,60.319 50.818,60.319 53.675,63.175 54.025,63.175 v1(57.9,67.05) ; U2.24@56.964,73.831 58.294,73.831 59.946,72.179 v2(59.953,72.179)
  Bottom Layer w0.254: v1(57.9,67.05) 57.9,71.55 58.218,71.869 59.343,71.869 59.653,72.179 v2(59.953,72.179) ; 57.9,67.468 cw(c57.482,67.468) 57.778,67.172 ccw(c57.482,67.468) 57.9,67.468 ; 57.9,67.468 ccw(c58.318,67.468) 58.022,67.172 cw(c58.318,67.468) 57.9,67.468
AD2: 3.2 U2.25 | length 29.3
  Top Layer w0.254: v1(55.225,74.275) 55.225,74.063 55.886,73.402 ; U2.25@56.964,73.331 56.893,73.402 55.886,73.402 ; 55.886,73.402 cw(c55.886,73.209) 56.045,73.318 ccw(c55.886,73.209) 55.886,73.402 ; 55.886,73.402 ccw(c56.015,73.531) 56.059,73.353 cw(c56.015,73.531) 55.886,73.402 ; v1@55.398,74.275 ccw(c56.328,74.275) 55.67,73.617 cw(c56.328,74.275) v1@55.398,74.275 ; 55.842,73.446 ccw(c56.064,73.668) 56.064,73.354 cw(c56.064,73.668) 55.842,73.446
  Bottom Layer w0.254: 3.2@46.355,59.436 46.855,59.436 48.633,57.658 49.665,57.658 50.3,58.293 50.3,62.049 52.163,63.913 54.488,63.913 54.681,64.105 54.681,72.676 55.225,73.22 v1(55.225,74.275)
AD3: BM1.3 U2.26 | length 48.5
  Top Layer w0.254: BM1.3@42.926,51.308 38,56.234 38,75.675 40.375,78.05 49.031,78.05 v2(52.078,75.004) ; v2(54.375,74.225) 55.769,72.831 U2.26@56.964,72.831
  Bottom Layer w0.254: v2(52.078,75.004) 53.596,75.004 v2(54.375,74.225)
AD4: BM2.3 U2.27 | length 43.6
  Top Layer w0.254: BM2.3@42.926,44.704 42.926,44.699 44.225,43.4 46.05,43.4 46.275,43.175 50.275,43.175 v2(50.927,43.827) ; v2(55.278,72.429) 55.375,72.331 U2.27@56.964,72.331 ; v2@55.412,72.563 ccw(c55.973,73.124) 55.973,72.331 cw(c55.973,73.124) v2@55.412,72.563
  Bottom Layer w0.254: v2(50.927,43.827) 50.925,43.83 50.925,62.1 52.332,63.506 54.657,63.506 55.278,64.127 v2(55.278,72.429)
AD5: CCD1.3 U2.28 | length 16.4
  Top Layer w0.254: CCD1.3@43.053,71.12 43.098,71.075 48.85,71.075 49.074,71.299 49.089,71.299 49.252,71.462 49.252,72.877 49.85,73.475 53.375,73.475 55.019,71.831 U2.28@56.964,71.831
BATTERY: AM1.3 AM2.3 AM3.3 C7.1 C8.1 CA1.1 CA2.1 CA3.1 CA4.1 D2.1 Q4.1 Q5.1 Q9.1 Q10.1 SW_ENG1.2 | length 77.8
  Top Layer w0.762: v3(149.35,47.65) AM1.3@149.35,48.55 ; AM1.3@149.35,47.943 AM1.3@149.338,47.931 ; v3(150.2,52.6) 147.95,52.6 145.475,55.075 142.6,55.075 141.729,54.204 CA4.1@141.729,53.086 141.729,50.549 CA2.1@141.732,50.546 AM2.3@141.732,47.945 ; AM2.3@141.718,47.931 ccw(c142.064,47.585) 141.628,47.363 cw(c142.064,47.585) AM2.3@141.718,47.931 ; AM2.3@141.718,47.931 AM2.3@141.732,47.945 ; 141.729,51.974 cw(c142.741,51.974) 142.025,52.69 ccw(c142.741,51.974) 141.729,51.974 ; 141.729,51.974 ccw(c140.717,51.974) 141.433,52.69 cw(c140.717,51.974) 141.729,51.974 ; 141.729,54.198 cw(c140.717,54.198) 141.433,53.482 ccw(c140.717,54.198) 141.729,54.198 ; 141.729,54.198 ccw(c142.741,54.198) 142.025,53.482 cw(c142.741,54.198) 141.729,54.198 ; AM2.3@141.732,47.945 ccw(c142.098,47.579) 141.626,47.367 cw(c142.098,47.579) AM2.3@141.732,47.945 ; AM1.3@149.338,47.931 ccw(c149.049,48.22) 149.424,48.382 cw(c149.049,48.22) AM1.3@149.338,47.931
  Top Layer w2.54: Q4.1@121.717,99.057 Q5.1@132.639,99.057 ; Q9.1@152.07,99.057 Q10.1@163.373,99.057
  Bottom Layer w0.762: v3(149.35,47.65) 149.35,49.531 CA3.1@150.238,50.419 150.241,50.422 CA1.1@150.241,52.578 ; CA3.1@149.942,50.815 ccw(c149.219,51.538) 150.241,51.538 cw(c149.219,51.538) CA3.1@149.942,50.815 ; 150.241,51.523 ccw(c151.242,51.523) 150.534,50.815 cw(c151.242,51.523) 150.241,51.523
  Bottom Layer w2.54: 132.25,99.8 132.275,99.825 C7.1@138.675,99.825 139.035,99.465 SW_ENG1.2@141.975,99.465 145.69,99.465 C8.1@145.9,99.675 152.2,99.675 152.225,99.65
  other v1: 145.175,99.315
  other v3: 141.7,47.4 149.35,48.35 141.675,48.375 151.55,98.875 132.975,99.025 152.375,99.025 132.125,99.05 150.825,99.6 151.75,99.725 152.925,99.75 133.6,99.775 131.575,99.875 132.575,99.875 151.3,100.4 152.325,100.4 132.125,100.55 133.2,100.55
CD/DATA3: MIC_SD1.2 R37.2 U2.7 | length 28.2
  Top Layer w0.254: U2.7@56.964,82.331 58.756,82.331 v1(59.25,82.825)
  Bottom Layer w0.254: MIC_SD1.2@49.089,88.021 49.485,87.625 ; MIC_SD1.2@49.528,88.05 cw(c49.718,87.564) 49.979,88.016 ; MIC_SD1.2@49.597,87.806 cw(c49.71,87.384) 49.928,87.762 ; MIC_SD1.2@49.62,87.813 cw(c49.964,86.934) 50.436,87.752 ; MIC_SD1.2@49.754,88.079 ccw(c50.373,88.245) 50.053,87.69 ; v1(59.25,82.825) 59.25,85.619 57.244,87.625 49.485,87.625 ; 49.485,87.625 ccw(c48.936,87.076) 48.816,87.843 cw(c48.936,87.076) 49.485,87.625 ; 59.25,83.243 cw(c58.832,83.243) 59.128,82.947 ccw(c58.832,83.243) 59.25,83.243 ; 59.25,83.243 ccw(c59.668,83.243) 59.372,82.947 cw(c59.668,83.243) 59.25,83.243 ; MIC_SD1.2@48.776,88.094 cw(c48.84,87.687) 49.132,87.978 ccw(c48.84,87.687) MIC_SD1.2@48.776,88.094 ; MIC_SD1.2@49.337,87.819 ccw(c49.807,88.289) 49.807,87.625 cw(c49.807,88.289) MIC_SD1.2@49.337,87.819 ; MIC_SD1.2@49.517,87.999 ccw(c50.42,88.902) 50.42,87.625 cw(c50.42,88.902) MIC_SD1.2@49.517,87.999 ; MIC_SD1.2@49.697,88.179 ccw(c51.033,89.515) 51.033,87.625 cw(c51.033,89.515) MIC_SD1.2@49.697,88.179
  other v1: 48.789,88.014
CLK: MIC_SD1.5 R34.2 U2.3 | length 12.4
  Top Layer w0.254: v1(54.95,84.25) 55.031,84.331 U2.3@56.964,84.331
  Bottom Layer w0.254: MIC_SD1.5@49.089,84.721 51.704,84.721 52.175,84.25 v1(54.95,84.25) ; 50.077,84.721 cw(c50.077,85.259) 49.697,84.879 ccw(c50.077,85.259) 50.077,84.721 ; 50.077,84.721 ccw(c50.077,84.183) 49.697,84.563 cw(c50.077,84.183) 50.077,84.721 ; 54.532,84.25 cw(c54.532,83.832) 54.828,84.128 ccw(c54.532,83.832) 54.532,84.25 ; 54.532,84.25 ccw(c54.532,84.668) 54.828,84.372 cw(c54.532,84.668) 54.532,84.25 ; MIC_SD1.5@48.911,84.59 cw(c49.228,84.273) 49.228,84.721 ccw(c49.228,84.273) MIC_SD1.5@48.911,84.59 ; MIC_SD1.5@48.911,84.834 ccw(c49.185,85.108) 49.185,84.721 cw(c49.185,85.108) MIC_SD1.5@48.911,84.834
  other v1: 48.789,84.712
CMD: MIC_SD1.3 R35.2 U2.4 | length 17.8
  Top Layer w0.254: U2.4@56.964,83.831 57.971,83.831 58.55,84.41 58.55,85.5 v1(57.6,86.45) ; U2.4@57.864,83.854 ccw(c57.864,84.168) 58.086,83.946 cw(c57.864,84.168) U2.4@57.864,83.854
  Bottom Layer w0.254: MIC_SD1.3@49.089,86.921 57.129,86.921 v1(57.6,86.45) ; 50.077,86.921 cw(c50.077,87.459) 49.697,87.079 ccw(c50.077,87.459) 50.077,86.921 ; 50.077,86.921 ccw(c50.077,86.383) 49.697,86.763 cw(c50.077,86.383) 50.077,86.921 ; 57.305,86.745 cw(c57.009,86.45) 57.427,86.45 ccw(c57.009,86.45) 57.305,86.745 ; 57.305,86.745 ccw(c57.6,87.041) 57.6,86.623 cw(c57.6,87.041) 57.305,86.745 ; MIC_SD1.3@48.911,86.749 cw(c49.327,86.333) 49.327,86.921 ccw(c49.327,86.333) MIC_SD1.3@48.911,86.749 ; MIC_SD1.3@48.911,86.993 ccw(c49.086,87.168) 49.086,86.921 cw(c49.086,87.168) MIC_SD1.3@48.911,86.993
  other v1: 48.789,86.871
D0: ManD1.3 Q2.2 | length 18.7
  Top Layer w0.33: v1(86.85,72.578) 88.175,71.253 v2(88.175,62.425) ; 87.08,72.348 cw(c87.311,72.578) 86.985,72.578 ccw(c87.311,72.578) 87.08,72.348 ; 87.08,72.348 ccw(c86.85,72.117) 86.85,72.443 cw(c86.85,72.117) 87.08,72.348 ; 88.175,62.793 cw(c87.807,62.793) 88.067,62.533 ccw(c87.807,62.793) 88.175,62.793 ; 88.175,62.793 ccw(c88.543,62.793) 88.283,62.533 cw(c88.543,62.793) 88.175,62.793
  Bottom Layer w0.33: v2@88.067,62.317 cw(c87.807,62.057) 88.175,62.057 cw(c88.543,62.057) v2@88.283,62.317 ; v2(88.175,62.425) 88.175,59.272 ManD1.3@89.662,57.785
D1: ManD1.4 Q1.2 | length 18.2
  Top Layer w0.33: 87.384,68.367 cw(c87.634,68.512) Q1.2@87.406,68.69 ; v1(87.45,63.55) Q1.2@87.45,68.823 ; 87.45,63.876 cw(c87.124,63.876) 87.355,63.645 ccw(c87.124,63.876) 87.45,63.876 ; 87.45,63.876 ccw(c87.776,63.876) 87.545,63.645 cw(c87.776,63.876) 87.45,63.876 ; Q1.2@87.205,68.678 cw(c86.612,68.085) 87.45,68.085 ccw(c86.612,68.085) Q1.2@87.205,68.678
  Bottom Layer w0.33: v1(87.45,63.55) 87.45,58.47 89.675,56.245 89.675,55.258 ManD1.4@89.662,55.245 ; 87.45,63.224 cw(c87.776,63.224) 87.545,63.455 ccw(c87.776,63.224) 87.45,63.224 ; 87.45,63.224 ccw(c87.124,63.224) 87.355,63.455 cw(c87.124,63.224) 87.45,63.224
DAC0: U2.38
DAC1: U2.39
DATA0: MIC_SD1.7 R33.2 U2.2 | length 11.8
  Top Layer w0.254: v1@52.088,82.512 54.406,84.831 U2.2@56.964,84.831
  Bottom Layer w0.254: MIC_SD1.7@49.089,82.521 v1(52.075,82.525) ; MIC_SD1.7@48.911,82.431 cw(c49.129,82.214) 49.128,82.521 ccw(c49.129,82.214) MIC_SD1.7@48.911,82.431 ; MIC_SD1.7@48.911,82.676 ccw(c49.284,83.05) 49.285,82.521 cw(c49.284,83.05) MIC_SD1.7@48.911,82.676 ; MIC_SD1.7@49.697,82.364 cw(c50.08,81.982) 50.079,82.522 ccw(c50.08,81.982) MIC_SD1.7@49.697,82.364 ; MIC_SD1.7@49.696,82.679 ccw(c50.075,83.059) 50.076,82.522 cw(c50.075,83.059) MIC_SD1.7@49.696,82.679
  other v1: 48.789,82.553
DATA1: MIC_SD1.8 R32.2 U2.1 | length 13.3
  Top Layer w0.254: R32.2@48.725,81.425 48.775,81.375 49.925,81.375 53.881,85.331 U2.1@56.964,85.331 ; R32.2@48.911,81.288 cw(c49.122,81.077) 49.122,81.375 ccw(c49.122,81.077) R32.2@48.911,81.288 ; R32.2@48.911,81.532 ccw(c49.291,81.912) 49.291,81.375 cw(c49.291,81.912) R32.2@48.911,81.532 ; R32.2@49.001,81.232 cw(c49.346,80.887) 49.346,81.375 ccw(c49.346,80.887) R32.2@49.001,81.232 ; R32.2@49.001,81.618 ccw(c49.587,82.205) 49.587,81.375 cw(c49.587,82.205) R32.2@49.001,81.618
  other v1: 48.789,81.41
DATA2: MIC_SD1.1 R36.2 U2.8 | length 15.6
  Top Layer w0.254: R36.2@48.775,89.125 48.953,89.125 50.85,87.228 v1(50.85,83.7) ; v1(54.025,81.825) 56.958,81.825 U2.8@56.964,81.831 ; 50.85,84.118 cw(c50.432,84.118) 50.728,83.822 ccw(c50.432,84.118) 50.85,84.118 ; 50.85,84.118 ccw(c51.268,84.118) 50.972,83.822 cw(c51.268,84.118) 50.85,84.118 ; R36.2@48.819,88.981 cw(c48.819,88.31) 49.293,88.784 ccw(c48.819,88.31) R36.2@48.819,88.981
  Bottom Layer w0.254: v1(50.85,83.7) 52.15,83.7 v1(54.025,81.825)
  other v1: 48.819,89.154